# Altium PCB pcb-6layer-1oz-1.6mm.PcbDoc
Units mm, origin at the board's own origin, x right, y up, seen from the top; angles counter-clockwise.
Board outline 150 x 100 mm, 6 copper layers (Top Layer(SIG1), MID1(SIG2), MID2(GND), MID3(PWR), MID4(GND), Bottom Layer(SIG3)), stack 1.579 mm thick; 44 components, 79 nets, 674 pads, 0 vias.
Unrouted connection lines stored in the file: 256.
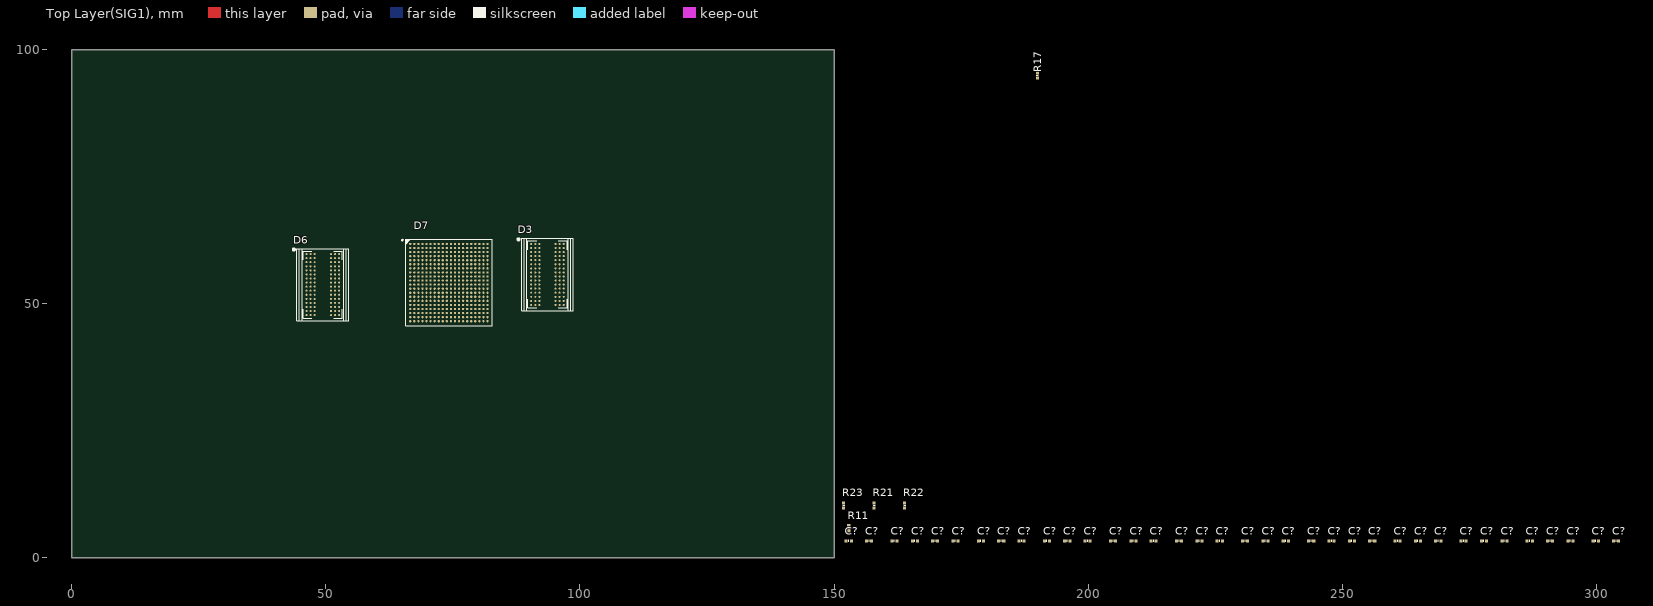
[diagram p0: Top Layer(SIG1) view]
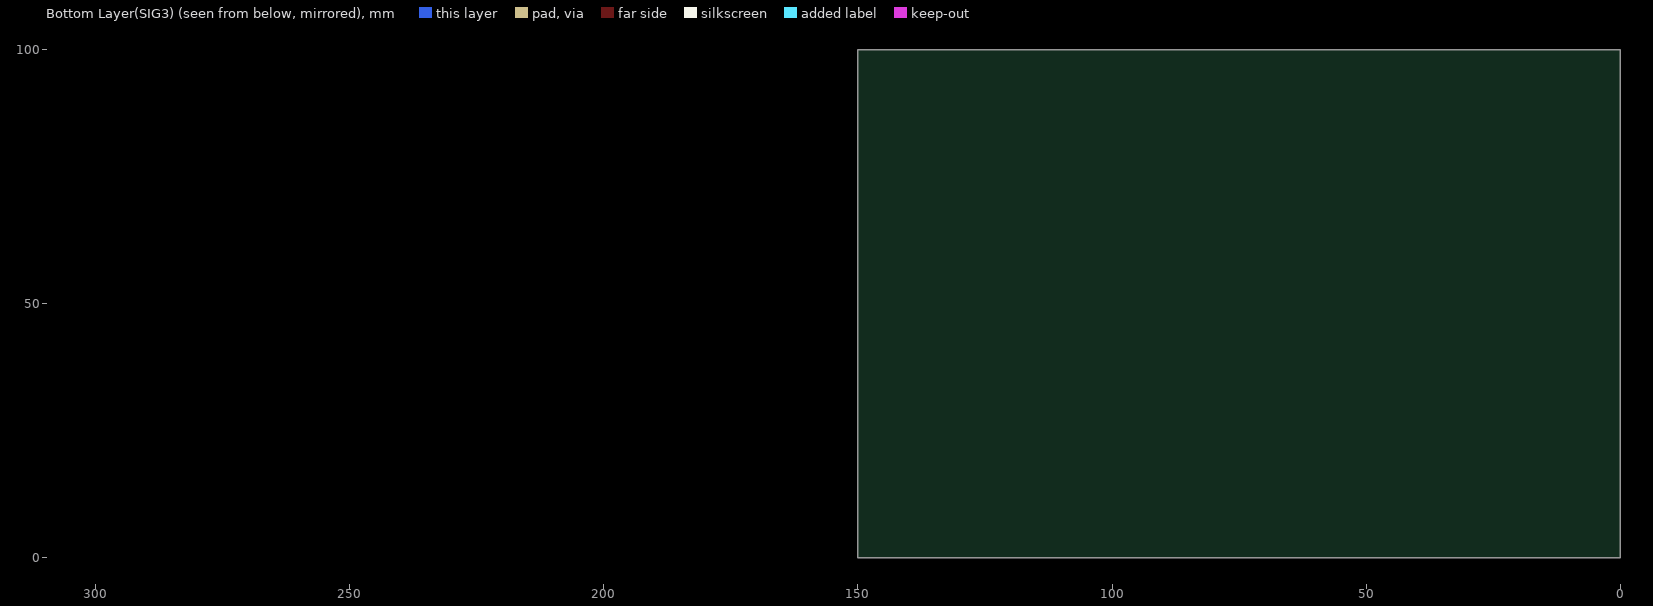
[diagram p1: Bottom Layer(SIG3) view, seen from below]

## Layer stack, top to bottom
Top Solder: solder mask 0.01, Solder Resist, Dk 3.5
Top Layer(SIG1): signal copper 0.036
Dielectric 2: prepreg 0.071, PP-006, Dk 4.1
MID1(SIG2): signal copper 0.036
Dielectric 4: prepreg 0.071, PP-006, Dk 4.1
MID2(GND): signal copper 0.036
Dielectric 1: dielectric 1.079, FR-4, Dk 4.8
MID3(PWR): signal copper 0.036
Dielectric 5: prepreg 0.071, PP-006, Dk 4.1
MID4(GND): signal copper 0.036
Dielectric 3: prepreg 0.071, PP-006, Dk 4.1
Bottom Layer(SIG3): signal copper 0.036
Bottom Solder: solder mask 0.01, Solder Resist, Dk 3.5

## Board outline
0,0 150,0 150,100 0,100

## Design rules (kind name [scope] priority, off if disabled: settings)
AssemblyTestPointUsage [All] p1 off:
AssemblyTestpoint [All] p1 off: testpointundercomponent=TRUE minsize=1.016 maxsize=2.54 preferedsize=1.524 minholesize=0 maxholesize=1.016 preferedholesize=0.813 testpointgrid=0.025 usegrid=TRUE gridtolerance=0 allowsidetop=TRUE allowsidebottom=TRUE
BoardOutlineClearance [All] p1: gap=0.3 ignorepadtopadclearanceinfootprint=FALSE
Clearance Clearance_MultiLayerPad [OnLayer('Multi-Layer') and IsPad] p1: gap=0.2 ignorepadtopadclearanceinfootprint=FALSE except(0: Arc-Hole Track-Hole SMDPad-Hole THPad-Hole Via-Hole Fill-Hole Poly-Hole Region-Hole Text-Hole)
Clearance Clearance_Polygon [InPolygon] p2: gap=0.254 ignorepadtopadclearanceinfootprint=TRUE except(0: Arc-Hole Track-Hole SMDPad-Hole THPad-Hole Via-Hole Fill-Hole Poly-Hole Region-Hole Text-Hole)
Clearance [All] p3: gap=0.2 ignorepadtopadclearanceinfootprint=FALSE except(0.15: Arc-SMDPad Track-SMDPad)
ComponentClearance [All] p1: gap=0.5 collisioncheckmode=3 verticalgap=0.5 showdistances=FALSE
DiffPairsRouting [All] p1: maxlimit=0.3 minlimit=0.1 mostfreqgap=0.15 toplayer_minwidth=0.1 toplayer_maxwidth=0.3 toplayer_prefwidth=0.15 midlayer1_minwidth=0.1 midlayer1_maxwidth=0.3 midlayer1_prefwidth=0.15 midlayer2_minwidth=0.1 midlayer2_maxwidth=0.3 midlayer2_prefwidth=0.15 midlayer3_minwidth=0.1 midlayer3_maxwidth=0.3 midlayer3_prefwidth=0.15 midlayer4_minwidth=0.1 midlayer4_maxwidth=0.3 midlayer4_prefwidth=0.15 bottomlayer_minwidth=0.1 bottomlayer_maxwidth=0.3 bottomlayer_prefwidth=0.15 maxuncoupledlength=12.7
FabricationTestPointUsage [All] p1 off: valid=0 allowmultiple=FALSE
FabricationTestpoint [All] p1 off: side=3 testpointundercomponent=TRUE minsize=1.016 maxsize=2.54 preferedsize=1.524 minholesize=0 maxholesize=1.016 preferedholesize=0.813 testpointgrid=0.025 allowsidetop=TRUE allowsidebottom=TRUE usegrid=TRUE gridtolerance=0
Height [All] p1: minheight=0 maxheight=50 prefheight=12.7
HoleSize [IsVia] p1: absolutevalues=TRUE maxlimit=10 minlimit=0.3 maxpercent=80.000 minpercent=20.000
HoleToHoleClearance [All] p1: gap=0.3 allowstackedmicrovias=TRUE
MatchedLengths MatchedLengths_SPI1 [InNetClass('SPI1')] p1: tolerance=0.25 checknetsindiffpair=FALSE checkdiffpairvsdiffpair=TRUE checkxsignals=TRUE checkothers=TRUE
MatchedLengths MatchedLengths_SPI_eeprom [InNetClass('SPI_eeprom')] p2: tolerance=0.25 checknetsindiffpair=FALSE checkdiffpairvsdiffpair=TRUE checkxsignals=TRUE checkothers=TRUE
MatchedLengths MatchedLengths_USART_gps [InNetClass('usart_GPS')] p3: tolerance=0.25 checknetsindiffpair=FALSE checkdiffpairvsdiffpair=TRUE checkxsignals=TRUE checkothers=TRUE
MatchedLengths MatchedLengths_SWD_F407 [InNetClass('STM32F4_swd')] p4: tolerance=0.25 checknetsindiffpair=FALSE checkdiffpairvsdiffpair=TRUE checkxsignals=TRUE checkothers=TRUE
MatchedLengths MatchedLengths_SPI_fram [InNetClass('SPI_fram')] p5: tolerance=0.25 checknetsindiffpair=FALSE checkdiffpairvsdiffpair=TRUE checkxsignals=TRUE checkothers=TRUE
MinimumSolderMaskSliver [All] p1 off: minsoldermaskwidth=0.2
PlaneClearance [All] p1: clearance=0.5
PlaneConnect [All] p1: planeconnectstyle=Relief reliefexpansion=0.5 reliefentries=4 reliefconductorwidth=0.2 reliefairgap=0.2
PolygonConnect PolygonConnect_PadGND [InNet('GND') and IsPad] p1: connectstyle=Relief reliefconductorwidth=0.2 reliefentries=4 polygonreliefangle="90 Angle" airgapwidth=0.2
PolygonConnect PolygonConnect_Via [IsVia] p2: connectstyle=Direct reliefconductorwidth=0.254 reliefentries=4 polygonreliefangle="90 Angle" airgapwidth=0.254
PolygonConnect [All] p3: connectstyle=Relief reliefconductorwidth=0.2 reliefentries=4 polygonreliefangle="90 Angle" airgapwidth=0.2
RoutingVias [All] p1: holewidth=0.2 width=0.45 viastyle="Through Hole" minholewidth=0.2 minwidth=0.4 maxholewidth=0.5 maxwidth=1.2
SilkToSilkClearance [All] p1 off: silktosilkclearance=0.254
SilkToSolderMaskClearance [IsPad] p1 off: minsilkscreentomaskgap=0.2 clearancetoexposedcopper=TRUE
SolderMaskExpansion [All] p1: expansion=0.075 istentingtop=FALSE
Width [All] p1: maxlimit=10 minlimit=0.1 preferedwidth=0.2
16 further rules are at their usual default settings.

## Classes and differential pairs
net class DQ24_31: DDR3_DM3 DDR3_DQ24 DDR3_DQ25 DDR3_DQ26 DDR3_DQ27 DDR3_DQ28 DDR3_DQ29 DDR3_DQ30 DDR3_DQ31
net class DQ16_23: DDR3_DM2 DDR3_DQ16 DDR3_DQ17 DDR3_DQ18 DDR3_DQ19 DDR3_DQ20 DDR3_DQ21 DDR3_DQ22 DDR3_DQ23
net class DQ8_15: DDR3_DM1 DDR3_DQ8 DDR3_DQ9 DDR3_DQ10 DDR3_DQ11 DDR3_DQ12 DDR3_DQ13 DDR3_DQ14 DDR3_DQ15 DDR3_DQS1_N DDR3_DQS1_P
net class DQ0_7: DDR3_DM0 DDR3_DQ0 DDR3_DQ1 DDR3_DQ2 DDR3_DQ3 DDR3_DQ4 DDR3_DQ5 DDR3_DQ6 DDR3_DQ7 DDR3_DQS0_N DDR3_DQS0_P
component class Designator: D7 R21 R22 R23
net class DDR_ADDRES: DDR3_A0 DDR3_A1 DDR3_A2 DDR3_A3 DDR3_A4 DDR3_A5 DDR3_A6 DDR3_A7 DDR3_A8 DDR3_A9 DDR3_A10 DDR3_A11 DDR3_A12 DDR3_A13 DDR3_A14 DDR3_BA0 DDR3_BA1 DDR3_BA2 DDR3_CK_N DDR3_CK_P DDR3_CKE DDR3_nCAS DDR3_nCS DDR3_nRAS DDR3_nWE DDR3_ODT
differential pair DDR3_DQS3: +DDR3_DQS3_P -DDR3_DQS3_N
differential pair DDR3_DQS2: +DDR3_DQS2_P -DDR3_DQS2_N
differential pair DDR3_DQS1: +DDR3_DQS1_P -DDR3_DQS1_N
differential pair DDR3_DQS0: +DDR3_DQS0_P -DDR3_DQS0_N
differential pair DDR3_CK: +DDR3_CK_P -DDR3_CK_N

## Components (designator, comment, footprint, x,y, rotation, side; value= is the part's Value field where it differs from the comment)
C? "Ceramic capacitor, 0.1μF, X7R, ±10%, 50V, 0402, -55...+125°C" "CAP: 0402" 230.887,3.359 r0 top value=0.1μF
C? "Ceramic capacitor, 0.1μF, X7R, ±10%, 50V, 0402, -55...+125°C" "CAP: 0402" 178.887,3.359 r0 top value=0.1μF
C? "Ceramic capacitor, 0.1μF, X7R, ±10%, 50V, 0402, -55...+125°C" "CAP: 0402" 204.887,3.359 r0 top value=0.1μF
C? "Ceramic capacitor, 0.1μF, X7R, ±10%, 50V, 0402, -55...+125°C" "CAP: 0402" 238.887,3.359 r0 top value=0.1μF
C? "Ceramic capacitor, 0.1μF, X7R, ±10%, 50V, 0402, -55...+125°C" "CAP: 0402" 247.887,3.359 r0 top value=0.1μF
C? "Ceramic capacitor, 0.1μF, X7R, ±10%, 50V, 0402, -55...+125°C" "CAP: 0402" 212.887,3.359 r0 top value=0.1μF
C? "Ceramic capacitor, 0.1μF, X7R, ±10%, 50V, 0402, -55...+125°C" "CAP: 0402" 221.887,3.359 r0 top value=0.1μF
C? "Ceramic capacitor, 0.1μF, X7R, ±10%, 50V, 0402, -55...+125°C" "CAP: 0402" 260.887,3.359 r0 top value=0.1μF
C? "Ceramic capacitor, 0.1μF, X7R, ±10%, 50V, 0402, -55...+125°C" "CAP: 0402" 191.887,3.359 r0 top value=0.1μF
C? "Ceramic capacitor, 0.1μF, X7R, ±10%, 50V, 0402, -55...+125°C" "CAP: 0402" 251.887,3.359 r0 top value=0.1μF
C? "Ceramic capacitor, 0.1μF, X7R, ±10%, 50V, 0402, -55...+125°C" "CAP: 0402" 294.887,3.359 r0 top value=0.1μF
C? "Ceramic capacitor, 0.1μF, X7R, ±10%, 50V, 0402, -55...+125°C" "CAP: 0402" 217.887,3.359 r0 top value=0.1μF
C? "Ceramic capacitor, 0.1μF, X7R, ±10%, 50V, 0402, -55...+125°C" "CAP: 0402" 186.887,3.359 r0 top value=0.1μF
C? "Ceramic capacitor, 0.1μF, X7R, ±10%, 50V, 0402, -55...+125°C" "CAP: 0402" 225.887,3.359 r0 top value=0.1μF
C? "Ceramic capacitor, 0.1μF, X7R, ±10%, 50V, 0402, -55...+125°C" "CAP: 0402" 299.887,3.359 r0 top value=0.1μF
C? "Ceramic capacitor, 0.1μF, X7R, ±10%, 50V, 0402, -55...+125°C" "CAP: 0402" 290.887,3.359 r0 top value=0.1μF
C? "Ceramic capacitor, 0.1μF, X7R, ±10%, 50V, 0402, -55...+125°C" "CAP: 0402" 169.887,3.359 r0 top value=0.1μF
C? "Ceramic capacitor, 0.1μF, X7R, ±10%, 50V, 0402, -55...+125°C" "CAP: 0402" 277.887,3.359 r0 top value=0.1μF
C? "Ceramic capacitor, 0.1μF, X7R, ±10%, 50V, 0402, -55...+125°C" "CAP: 0402" 234.887,3.359 r0 top value=0.1μF
C? "Ceramic capacitor, 0.1μF, X7R, ±10%, 50V, 0402, -55...+125°C" "CAP: 0402" 264.887,3.359 r0 top value=0.1μF
C? "Ceramic capacitor, 0.1μF, X7R, ±10%, 50V, 0402, -55...+125°C" "CAP: 0402" 152.887,3.359 r0 top value=0.1μF
C? "Ceramic capacitor, 0.1μF, X7R, ±10%, 50V, 0402, -55...+125°C" "CAP: 0402" 199.887,3.359 r0 top value=0.1μF
C? "Ceramic capacitor, 0.1μF, X7R, ±10%, 50V, 0402, -55...+125°C" "CAP: 0402" 182.887,3.359 r0 top value=0.1μF
C? "Ceramic capacitor, 0.1μF, X7R, ±10%, 50V, 0402, -55...+125°C" "CAP: 0402" 165.887,3.359 r0 top value=0.1μF
C? "Ceramic capacitor, 0.1μF, X7R, ±10%, 50V, 0402, -55...+125°C" "CAP: 0402" 303.887,3.359 r0 top value=0.1μF
C? "Ceramic capacitor, 0.1μF, X7R, ±10%, 50V, 0402, -55...+125°C" "CAP: 0402" 281.887,3.359 r0 top value=0.1μF
C? "Ceramic capacitor, 0.1μF, X7R, ±10%, 50V, 0402, -55...+125°C" "CAP: 0402" 286.887,3.359 r0 top value=0.1μF
C? "Ceramic capacitor, 0.1μF, X7R, ±10%, 50V, 0402, -55...+125°C" "CAP: 0402" 161.887,3.359 r0 top value=0.1μF
C? "Ceramic capacitor, 0.1μF, X7R, ±10%, 50V, 0402, -55...+125°C" "CAP: 0402" 173.887,3.359 r0 top value=0.1μF
C? "Ceramic capacitor, 0.1μF, X7R, ±10%, 50V, 0402, -55...+125°C" "CAP: 0402" 243.887,3.359 r0 top value=0.1μF
C? "Ceramic capacitor, 0.1μF, X7R, ±10%, 50V, 0402, -55...+125°C" "CAP: 0402" 195.887,3.359 r0 top value=0.1μF
C? "Ceramic capacitor, 0.1μF, X7R, ±10%, 50V, 0402, -55...+125°C" "CAP: 0402" 268.887,3.359 r0 top value=0.1μF
C? "Ceramic capacitor, 0.1μF, X7R, ±10%, 50V, 0402, -55...+125°C" "CAP: 0402" 273.887,3.359 r0 top value=0.1μF
C? "Ceramic capacitor, 0.1μF, X7R, ±10%, 50V, 0402, -55...+125°C" "CAP: 0402" 156.887,3.359 r0 top value=0.1μF
C? "Ceramic capacitor, 0.1μF, X7R, ±10%, 50V, 0402, -55...+125°C" "CAP: 0402" 208.887,3.359 r0 top value=0.1μF
C? "Ceramic capacitor, 0.1μF, X7R, ±10%, 50V, 0402, -55...+125°C" "CAP: 0402" 255.887,3.359 r0 top value=0.1μF
D3 "DDR3L SDRAM, DDR3, 128Mb (8M x 16), 166 MHz, Parallel, 3...3.6V, 0...+70°C, FBGA-96" "IC: FBGA96" 93.6,55.8 r0 top
D6 "DDR3L SDRAM, DDR3, 128Mb (8M x 16), 166 MHz, Parallel, 3...3.6V, 0...+70°C, FBGA-96" "IC: FBGA96" 49.4,53.8 r0 top
D7 "IC FPGA, Zynq, , , , 1.15...1.25V, 0...+85°C, CSPBGA-400" IC:BGA400C80P20X20_1700X1700X147 74.2,54.2 r0 top
R11 "Resistor film, 4.7k, ±1%, 0402, 0.063W, -55...+125°C" "RES: 0402" 152.887,5.859 r90 top value=4.7k
R17 "Resistor film, 240R, ±1%, 0603, 0.1W, -55...+125°C" "RES: 0402" 190,94.959 r90 top value=240R
R21 "Resistor film, 82R, ±1%, 0402, 0.063W, -55...+125°C" "RES: 0402" 157.887,10.359 r90 top value=82R
R22 "Resistor film, 82R, ±1%, 0402, 0.063W, -55...+125°C" "RES: 0402" 163.887,10.359 r90 top value=82R
R23 "Resistor film, 82R, ±1%, 0402, 0.063W, -55...+125°C" "RES: 0402" 151.887,10.359 r90 top value=82R

## Footprints (in the part's own frame and the unit in brackets; to place one, negate y for a bottom-side part, rotate by r counter-clockwise, add the part's x,y. Pads: shape width x height; smd on the part's side, far side on the other; paste and mask are expansions set on the pad)
"CAP: 0402" [mm]
  rect 0.6x0.6 smd: 1(-0.5,0) 2(0.5,0)
  silkscreen extent 0,-0.2 0,0.2, body extent -0.52,-0.25 0.51,0.25, height 0.51
"IC: FBGA96" [mm]
  round 0.4 smd: A1(-3.2,6) A2(-2.4,6) A3(-1.6,6) A7(1.6,6) A8(2.4,6) A9(3.2,6) B1(-3.2,5.2) B2(-2.4,5.2) B3(-1.6,5.2) B7(1.6,5.2) B8(2.4,5.2) B9(3.2,5.2) C1(-3.2,4.4) C2(-2.4,4.4) C3(-1.6,4.4) C7(1.6,4.4) C8(2.4,4.4) C9(3.2,4.4) D1(-3.2,3.6) D2(-2.4,3.6) D3(-1.6,3.6) D7(1.6,3.6) D8(2.4,3.6) D9(3.2,3.6) E1(-3.2,2.8) E2(-2.4,2.8) E3(-1.6,2.8) E7(1.6,2.8) E8(2.4,2.8) E9(3.2,2.8) F1(-3.2,2) F2(-2.4,2) F3(-1.6,2) F7(1.6,2) F8(2.4,2) F9(3.2,2) G1(-3.2,1.2) G2(-2.4,1.2) G3(-1.6,1.2) G7(1.6,1.2) G8(2.4,1.2) G9(3.2,1.2) H1(-3.2,0.4) H2(-2.4,0.4) H3(-1.6,0.4) H7(1.6,0.4) H8(2.4,0.4) H9(3.2,0.4) J1(-3.2,-0.4) J2(-2.4,-0.4) J3(-1.6,-0.4) J7(1.6,-0.4) J8(2.4,-0.4) J9(3.2,-0.4) K1(-3.2,-1.2) K2(-2.4,-1.2) K3(-1.6,-1.2) K7(1.6,-1.2) K8(2.4,-1.2) K9(3.2,-1.2) L1(-3.2,-2) L2(-2.4,-2) L3(-1.6,-2) L7(1.6,-2) L8(2.4,-2) L9(3.2,-2) M1(-3.2,-2.8) M2(-2.4,-2.8) M3(-1.6,-2.8) M7(1.6,-2.8) M8(2.4,-2.8) M9(3.2,-2.8) N1(-3.2,-3.6) N2(-2.4,-3.6) N3(-1.6,-3.6) N7(1.6,-3.6) N8(2.4,-3.6) N9(3.2,-3.6) P1(-3.2,-4.4) P2(-2.4,-4.4) P3(-1.6,-4.4) P7(1.6,-4.4) P8(2.4,-4.4) P9(3.2,-4.4) R1(-3.2,-5.2) R2(-2.4,-5.2) R3(-1.6,-5.2) R7(1.6,-5.2) R8(2.4,-5.2) R9(3.2,-5.2) T1(-3.2,-6) T2(-2.4,-6) T3(-1.6,-6) T7(1.6,-6) T8(2.4,-6) T9(3.2,-6)
  silkscreen extent -5.9,-7.1 5.1,7.1, body extent -4,-7 4,7, height 1.35
IC:BGA400C80P20X20_1700X1700X147 [mm] "BGA, 400-Leads, Body 17,00x17,00mmx1,47mm, Pitch 0,80mm"
  round 0.45 smd: A1(-7.6,7.6) A2(-6.8,7.6) A3(-6,7.6) A4(-5.2,7.6) A5(-4.4,7.6) A6(-3.6,7.6) A7(-2.8,7.6) A8(-2,7.6) A9(-1.2,7.6) A10(-0.4,7.6) A11(0.4,7.6) A12(1.2,7.6) A13(2,7.6) A14(2.8,7.6) A15(3.6,7.6) A16(4.4,7.6) A17(5.2,7.6) A18(6,7.6) A19(6.8,7.6) A20(7.6,7.6) B1(-7.6,6.8) B2(-6.8,6.8) B3(-6,6.8) B4(-5.2,6.8) B5(-4.4,6.8) B6(-3.6,6.8) B7(-2.8,6.8) B8(-2,6.8) B9(-1.2,6.8) B10(-0.4,6.8) B11(0.4,6.8) B12(1.2,6.8) B13(2,6.8) B14(2.8,6.8) B15(3.6,6.8) B16(4.4,6.8) B17(5.2,6.8) B18(6,6.8) B19(6.8,6.8) B20(7.6,6.8) C1(-7.6,6) C2(-6.8,6) C3(-6,6) C4(-5.2,6) C5(-4.4,6) C6(-3.6,6) C7(-2.8,6) C8(-2,6) C9(-1.2,6) C10(-0.4,6) C11(0.4,6) C12(1.2,6) C13(2,6) C14(2.8,6) C15(3.6,6) C16(4.4,6) C17(5.2,6) C18(6,6) C19(6.8,6) C20(7.6,6) D1(-7.6,5.2) D2(-6.8,5.2) D3(-6,5.2) D4(-5.2,5.2) D5(-4.4,5.2) D6(-3.6,5.2) D7(-2.8,5.2) D8(-2,5.2) D9(-1.2,5.2) D10(-0.4,5.2) D11(0.4,5.2) D12(1.2,5.2) D13(2,5.2) D14(2.8,5.2) D15(3.6,5.2) D16(4.4,5.2) D17(5.2,5.2) D18(6,5.2) D19(6.8,5.2) D20(7.6,5.2) E1(-7.6,4.4) E2(-6.8,4.4) E3(-6,4.4) E4(-5.2,4.4) E5(-4.4,4.4) E6(-3.6,4.4) E7(-2.8,4.4) E8(-2,4.4) E9(-1.2,4.4) E10(-0.4,4.4) E11(0.4,4.4) E12(1.2,4.4) E13(2,4.4) E14(2.8,4.4) E15(3.6,4.4) E16(4.4,4.4) E17(5.2,4.4) E18(6,4.4) E19(6.8,4.4) E20(7.6,4.4) F1(-7.6,3.6) F2(-6.8,3.6) F3(-6,3.6) F4(-5.2,3.6) F5(-4.4,3.6) F6(-3.6,3.6) F7(-2.8,3.6) F8(-2,3.6) F9(-1.2,3.6) F10(-0.4,3.6) F11(0.4,3.6) F12(1.2,3.6) F13(2,3.6) F14(2.8,3.6) F15(3.6,3.6) F16(4.4,3.6) F17(5.2,3.6) F18(6,3.6) F19(6.8,3.6) F20(7.6,3.6) G1(-7.6,2.8) G2(-6.8,2.8) G3(-6,2.8) G4(-5.2,2.8) G5(-4.4,2.8) G6(-3.6,2.8) G7(-2.8,2.8) G8(-2,2.8) G9(-1.2,2.8) G10(-0.4,2.8) G11(0.4,2.8) G12(1.2,2.8) G13(2,2.8) G14(2.8,2.8) G15(3.6,2.8) G16(4.4,2.8) G17(5.2,2.8) G18(6,2.8) G19(6.8,2.8) G20(7.6,2.8) H1(-7.6,2) H2(-6.8,2) H3(-6,2) H4(-5.2,2) H5(-4.4,2) H6(-3.6,2) H7(-2.8,2) H8(-2,2) H9(-1.2,2) H10(-0.4,2) H11(0.4,2) H12(1.2,2) H13(2,2) H14(2.8,2) H15(3.6,2) H16(4.4,2) H17(5.2,2) H18(6,2) H19(6.8,2) H20(7.6,2) J1(-7.6,1.2) J2(-6.8,1.2) J3(-6,1.2) J4(-5.2,1.2) J5(-4.4,1.2) J6(-3.6,1.2) J7(-2.8,1.2) J8(-2,1.2) J9(-1.2,1.2) J10(-0.4,1.2) J11(0.4,1.2) J12(1.2,1.2) J13(2,1.2) J14(2.8,1.2) J15(3.6,1.2) J16(4.4,1.2) J17(5.2,1.2) J18(6,1.2) J19(6.8,1.2) J20(7.6,1.2) K1(-7.6,0.4) K2(-6.8,0.4) K3(-6,0.4) K4(-5.2,0.4) K5(-4.4,0.4) K6(-3.6,0.4) K7(-2.8,0.4) K8(-2,0.4) K9(-1.2,0.4) K10(-0.4,0.4) K11(0.4,0.4) K12(1.2,0.4) K13(2,0.4) K14(2.8,0.4) K15(3.6,0.4) K16(4.4,0.4) K17(5.2,0.4) K18(6,0.4) K19(6.8,0.4) K20(7.6,0.4) L1(-7.6,-0.4) L2(-6.8,-0.4) L3(-6,-0.4) L4(-5.2,-0.4) L5(-4.4,-0.4) L6(-3.6,-0.4) L7(-2.8,-0.4) L8(-2,-0.4) L9(-1.2,-0.4) L10(-0.4,-0.4) L11(0.4,-0.4) L12(1.2,-0.4) L13(2,-0.4) L14(2.8,-0.4) L15(3.6,-0.4) L16(4.4,-0.4) L17(5.2,-0.4) L18(6,-0.4) L19(6.8,-0.4) L20(7.6,-0.4) M1(-7.6,-1.2) M2(-6.8,-1.2) M3(-6,-1.2) M4(-5.2,-1.2) M5(-4.4,-1.2) M6(-3.6,-1.2) M7(-2.8,-1.2) M8(-2,-1.2) M9(-1.2,-1.2) M10(-0.4,-1.2) M11(0.4,-1.2) M12(1.2,-1.2) M13(2,-1.2) M14(2.8,-1.2) M15(3.6,-1.2) M16(4.4,-1.2) M17(5.2,-1.2) M18(6,-1.2) M19(6.8,-1.2) M20(7.6,-1.2) N1(-7.6,-2) N2(-6.8,-2) N3(-6,-2) N4(-5.2,-2) N5(-4.4,-2) N6(-3.6,-2) N7(-2.8,-2) N8(-2,-2) N9(-1.2,-2) N10(-0.4,-2) N11(0.4,-2) N12(1.2,-2) N13(2,-2) N14(2.8,-2) N15(3.6,-2) N16(4.4,-2) N17(5.2,-2) N18(6,-2) N19(6.8,-2) N20(7.6,-2) P1(-7.6,-2.8) P2(-6.8,-2.8) P3(-6,-2.8) P4(-5.2,-2.8) P5(-4.4,-2.8) P6(-3.6,-2.8) P7(-2.8,-2.8) P8(-2,-2.8) P9(-1.2,-2.8) P10(-0.4,-2.8) P11(0.4,-2.8) P12(1.2,-2.8) P13(2,-2.8) P14(2.8,-2.8) P15(3.6,-2.8) P16(4.4,-2.8) P17(5.2,-2.8) P18(6,-2.8) P19(6.8,-2.8) P20(7.6,-2.8) R1(-7.6,-3.6) R2(-6.8,-3.6) R3(-6,-3.6) R4(-5.2,-3.6) R5(-4.4,-3.6) R6(-3.6,-3.6) R7(-2.8,-3.6) R8(-2,-3.6) R9(-1.2,-3.6) R10(-0.4,-3.6) R11(0.4,-3.6) R12(1.2,-3.6) R13(2,-3.6) R14(2.8,-3.6) R15(3.6,-3.6) R16(4.4,-3.6) R17(5.2,-3.6) R18(6,-3.6) R19(6.8,-3.6) R20(7.6,-3.6) T1(-7.6,-4.4) T2(-6.8,-4.4) T3(-6,-4.4) T4(-5.2,-4.4) T5(-4.4,-4.4) T6(-3.6,-4.4) T7(-2.8,-4.4) T8(-2,-4.4) T9(-1.2,-4.4) T10(-0.4,-4.4) T11(0.4,-4.4) T12(1.2,-4.4) T13(2,-4.4) T14(2.8,-4.4) T15(3.6,-4.4) T16(4.4,-4.4) T17(5.2,-4.4) T18(6,-4.4) T19(6.8,-4.4) T20(7.6,-4.4) U1(-7.6,-5.2) U2(-6.8,-5.2) U3(-6,-5.2) U4(-5.2,-5.2) U5(-4.4,-5.2) U6(-3.6,-5.2) U7(-2.8,-5.2) U8(-2,-5.2) U9(-1.2,-5.2) U10(-0.4,-5.2) U11(0.4,-5.2) U12(1.2,-5.2) U13(2,-5.2) U14(2.8,-5.2) U15(3.6,-5.2) U16(4.4,-5.2) U17(5.2,-5.2) U18(6,-5.2) U19(6.8,-5.2) U20(7.6,-5.2) V1(-7.6,-6) V2(-6.8,-6) V3(-6,-6) V4(-5.2,-6) V5(-4.4,-6) V6(-3.6,-6) V7(-2.8,-6) V8(-2,-6) V9(-1.2,-6) V10(-0.4,-6) V11(0.4,-6) V12(1.2,-6) V13(2,-6) V14(2.8,-6) V15(3.6,-6) V16(4.4,-6) V17(5.2,-6) V18(6,-6) V19(6.8,-6) V20(7.6,-6) W1(-7.6,-6.8) W2(-6.8,-6.8) W3(-6,-6.8) W4(-5.2,-6.8) W5(-4.4,-6.8) W6(-3.6,-6.8) W7(-2.8,-6.8) W8(-2,-6.8) W9(-1.2,-6.8) W10(-0.4,-6.8) W11(0.4,-6.8) W12(1.2,-6.8) W13(2,-6.8) W14(2.8,-6.8) W15(3.6,-6.8) W16(4.4,-6.8) W17(5.2,-6.8) W18(6,-6.8) W19(6.8,-6.8) W20(7.6,-6.8) Y1(-7.6,-7.6) Y2(-6.8,-7.6) Y3(-6,-7.6) Y4(-5.2,-7.6) Y5(-4.4,-7.6) Y6(-3.6,-7.6) Y7(-2.8,-7.6) Y8(-2,-7.6) Y9(-1.2,-7.6) Y10(-0.4,-7.6) Y11(0.4,-7.6) Y12(1.2,-7.6) Y13(2,-7.6) Y14(2.8,-7.6) Y15(3.6,-7.6) Y16(4.4,-7.6) Y17(5.2,-7.6) Y18(6,-7.6) Y19(6.8,-7.6) Y20(7.6,-7.6)
  silkscreen extent -9.27,-8.5 8.5,8.5, body extent -8.5,-8.5 8.5,8.5, height 1.47
"RES: 0402" [mm]
  rect 0.6x0.6 smd: 1(-0.5,0) 2(0.5,0)
  silkscreen extent 0,-0.2 0,0.2, body extent -0.52,-0.25 0.47,0.25, height 0.34

## Part data
C? C? C? C? C? C? C? C? C? C? C? C? C? C? C? C? C? C? C? C? C? C? C? C? C? C? C? C? C? C? C? C? C? C? C? C?: library part Ceramic_0402, Manufacturer="Murata Electronics", Package=0402, PartNumber=GRM155R71H104KE14D, Temperature=-55...+125°C, Tolerance=±10%, TypeCapacitor="Ceramic capacitor", TypeDielectric=X7R, Voltage=50V, HelpURL=https://www.lcsc.com/product-detail/Multilayer-Ceramic-Capacitors-MLCC-SMD-SMT_Murata-Electronics-GRM155R71H104KE14D_C77020.html, ValueManufacturerPartNumber="Ceramic capacitor, 0.1μF, X7R, ±10%, 50V, 0402, -55...+125°C"
D3 D6: library part MT41K256M16TW-107, "DDR3L SDRAM", Manufacturer="Micron Tech", Package=FBGA-96, Temperature=0...+70°C, ComponentType="DDR3L SDRAM", HelpURL=https://www.lcsc.com/product-detail/DDR-SDRAM_Micron-Tech-MT41K256M16TW-107-IT-P_C367428.html, InterfaceData=Parallel, MemorySize="128Mb (8M x 16)", MemoryType=DDR3, PartNumber=MT41K256M16TW-107, Speed="166 MHz", Supply=3...3.6V, ValueManufacturerPartNumber="DDR3L SDRAM, DDR3, 128Mb (8M x 16), 166 MHz, Parallel, 3...3.6V, 0...+70°C, FBGA-96"
D7: library part XC7Z020_CLG400ABX22, "FPGA XILINX Zynq XC7Z020", Manufacturer=AMD/XILINX, Package=CSPBGA-400, PartNumber=XC7Z020-2CLG400I, Temperature=0...+85°C, ComponentType="IC FPGA", HelpURL=https://www.lcsc.com/product-detail/Programmable-Logic-Device-CPLDs-FPGAs_AMD-XILINX-XC7Z020-2CLG400I_C569043.html, Series=Zynq, Supply=1.15...1.25V, ValueManufacturerPartNumber="IC FPGA, Zynq, , , , 1.15...1.25V, 0...+85°C, CSPBGA-400"
R11: library part Resistor_0402, Manufacturer=Yageo, Package=0402, PartNumber=RC0402FR-074K7L, Power=0.063W, Temperature=-55...+125°C, Tolerance=±1%, TypeResistor="Resistor film", HelpURL=https://www.lcsc.com/product-detail/Chip-Resistor-Surface-Mount_YAGEO-RC0402FR-074K7L_C105871.html, ValueManufacturerPartNumber="Resistor film, 4.7k, ±1%, 0402, 0.063W, -55...+125°C"
R17: library part Resistor_0603, Manufacturer=Yageo, Package=0603, PartNumber=RC0603JR-07100RL, Power=0.1W, Temperature=-55...+125°C, Tolerance=±1%, TypeResistor="Resistor film", HelpURL=https://www.digikey.com/product-detail/en/yageo/RC0603JR-07100RL/311-100GRCT-ND/729644, ValueManufacturerPartNumber="Resistor film, 240R, ±1%, 0603, 0.1W, -55...+125°C"
R21 R22 R23: library part Resistor_0402, Manufacturer=Yageo, Package=0402, PartNumber=RC0402FR-0782RL, Power=0.063W, Temperature=-55...+125°C, Tolerance=±1%, TypeResistor="Resistor film", HelpURL=https://www.lcsc.com/product-detail/Chip-Resistor-Surface-Mount_YAGEO-RC0402FR-0782RL_C163453.html, ValueManufacturerPartNumber="Resistor film, 82R, ±1%, 0402, 0.063W, -55...+125°C"

## Nets (pads, with @x,y where several pads share a name; then routed paths per layer and width w, separated by ;. In a path a pad name is that pad's centre, name@x,y a point inside that pad or via, vN(x,y) a via of type N, cw(c..) or ccw(c..) an arc to the next point about the centre after c; other vN are vias at no path point)
DDR3_A0: D3.N3 D6.N3 D7.N2
DDR3_A1: D3.P7 D6.P7 D7.K2
DDR3_A2: D3.P3 D6.P3 D7.M3
DDR3_A3: D3.N2 D6.N2 D7.K3
DDR3_A4: D3.P8 D6.P8 D7.M4
DDR3_A5: D3.P2 D6.P2 D7.L1
DDR3_A6: D3.R8 D6.R8 D7.L4
DDR3_A7: D3.R2 D6.R2 D7.K4
DDR3_A8: D3.T8 D6.T8 D7.K1
DDR3_A9: D3.R3 D6.R3 D7.J4
DDR3_A10: D3.L7 D6.L7 D7.F5
DDR3_A11: D3.R7 D6.R7 D7.G4
DDR3_A12: D3.N7 D6.N7 D7.E4
DDR3_A13: D3.T3 D6.T3 D7.D4
DDR3_A14: D3.T7 D6.T7 D7.F4
DDR3_BA0: D3.M2 D6.M2 D7.L5
DDR3_BA1: D3.N8 D6.N8 D7.R4
DDR3_BA2: D3.M3 D6.M3 D7.J5
DDR3_CK_N: D3.K7 D6.K7 D7.M2 R22.1
DDR3_CK_P: D3.J7 D6.J7 D7.L2 R22.2
DDR3_CKE: D3.K9 D6.K9 D7.N3
DDR3_DM0: D6.E7 D7.A1
DDR3_DM1: D6.D3 D7.F1
DDR3_DM2: D3.E7 D7.T1
DDR3_DM3: D3.D3 D7.Y1
DDR3_DQ0: D6.E3 D7.C3
DDR3_DQ1: D6.F7 D7.B3
DDR3_DQ2: D6.F2 D7.A2
DDR3_DQ3: D6.F8 D7.A4
DDR3_DQ4: D6.H3 D7.D3
DDR3_DQ5: D6.H8 D7.D1
DDR3_DQ6: D6.G2 D7.C1
DDR3_DQ7: D6.H7 D7.E1
DDR3_DQ8: D6.D7 D7.E2
DDR3_DQ9: D6.C3 D7.E3
DDR3_DQ10: D6.C8 D7.G3
DDR3_DQ11: D6.C2 D7.H3
DDR3_DQ12: D6.A7 D7.J3
DDR3_DQ13: D6.A2 D7.H2
DDR3_DQ14: D6.B8 D7.H1
DDR3_DQ15: D6.A3 D7.J1
DDR3_DQ16: D3.E3 D7.P1
DDR3_DQ17: D3.F7 D7.P3
DDR3_DQ18: D3.F2 D7.R3
DDR3_DQ19: D3.F8 D7.R1
DDR3_DQ20: D3.H3 D7.T4
DDR3_DQ21: D3.H8 D7.U4
DDR3_DQ22: D3.G2 D7.U2
DDR3_DQ23: D3.H7 D7.U3
DDR3_DQ24: D3.D7 D7.V1
DDR3_DQ25: D3.C3 D7.Y3
DDR3_DQ26: D3.C8 D7.W1
DDR3_DQ27: D3.C2 D7.Y4
DDR3_DQ28: D3.A7 D7.Y2
DDR3_DQ29: D3.A2 D7.W3
DDR3_DQ30: D3.B8 D7.V2
DDR3_DQ31: D3.A3 D7.V3
DDR3_DQS0_N: D6.G3 D7.B2
DDR3_DQS0_P: D6.F3 D7.C2
DDR3_DQS1_N: D6.B7 D7.F2
DDR3_DQS1_P: D6.C7 D7.G2
DDR3_DQS2_N: D3.G3 D7.T2
DDR3_DQS2_P: D3.F3 D7.R2
DDR3_DQS3_N: D3.B7 D7.W4
DDR3_DQS3_P: D3.C7 D7.W5
DDR3_nCAS: D3.K3 D6.K3 D7.P5
DDR3_nCS: D3.L2 D6.L2 D7.N1
DDR3_nRAS: D3.J3 D6.J3 D7.P4
DDR3_nRESET: D7.B4
DDR3_nWE: D3.L3 D6.L3 D7.M5
DDR3_ODT: D3.K1 D6.K1 D7.N5
DDR3_VDD: C?.2 D3.A1 D3.A8 D3.B2 D3.C1 D3.C9 D3.D2 D3.D9 D3.E9 D3.F1 D3.G7 D3.H2 D3.H9 D3.K2 D3.K8 D3.N1 D3.N9 D3.R1 D3.R9 D6.A1 D6.A8 D6.B2 D6.C1 D6.C9 D6.D2 D6.D9 D6.E9 D6.F1 D6.G7 D6.H2 D6.H9 D6.K2 D6.K8 D6.N1 D6.N9 D6.R1 D6.R9 R21.1
DDR3_VREF: D3.H1 D3.M8 D6.H1 D6.M8
DDR3_VTT: 
GND: C?.1 D3.A9 D3.B1 D3.B3 D3.B9 D3.D1 D3.D8 D3.E1 D3.E2 D3.E8 D3.F9 D3.G1 D3.G8 D3.G9 D3.J2 D3.J8 D3.M1 D3.M9 D3.P1 D3.P9 D3.T1 D3.T9 D6.A9 D6.B1 D6.B3 D6.B9 D6.D1 D6.D8 D6.E1 D6.E2 D6.E8 D6.F9 D6.G1 D6.G8 D6.G9 D6.J2 D6.J8 D6.M1 D6.M9 D6.P1 D6.P9 D6.T1 D6.T9 R11.2 R17.2 R23.2
NetD3_L8: D3.L8
NetD6_L8: D6.L8 R17.1
NetD7_G5: D7.G5 R23.1
NetD7_H5: D7.H5 R21.2
pads on no net: D3.J1 D3.J9 D3.L1 D3.L9 D3.M7 D3.T2 D6.J1 D6.J9 D6.L1 D6.L9 D6.M7 D6.T2 D7.A3 D7.A5 D7.A6 D7.A7 D7.A8 D7.A9 D7.A10 D7.A11 D7.A12 D7.A13 D7.A14 D7.A15 D7.A16 D7.A17 D7.A18 D7.A19 D7.A20 D7.B1 D7.B5 D7.B6 D7.B7 D7.B8 D7.B9 D7.B10 D7.B11 D7.B12 D7.B13 D7.B14 D7.B15 D7.B16 D7.B17 D7.B18 D7.B19 D7.B20 D7.C4 D7.C5 D7.C6 D7.C7 D7.C8 D7.C9 D7.C10 D7.C11 D7.C12 D7.C13 D7.C14 D7.C15 D7.C16 D7.C17 D7.C18 D7.C19 D7.C20 D7.D2 D7.D5 D7.D6 D7.D7 D7.D8 D7.D9 D7.D10 D7.D11 D7.D12 D7.D13 D7.D14 D7.D15 D7.D16 D7.D17 D7.D18 D7.D19 D7.D20 D7.E5 D7.E6 D7.E7 D7.E8 D7.E9 D7.E10 D7.E11 D7.E12 D7.E13 D7.E14 D7.E15 D7.E16 D7.E17 D7.E18 D7.E19 D7.E20 D7.F3 D7.F6 D7.F7 D7.F8 D7.F9 D7.F10 D7.F11 D7.F12 D7.F13 D7.F14 D7.F15 D7.F16 D7.F17 D7.F18 D7.F19 D7.F20 D7.G1 D7.G6 D7.G7 D7.G8 D7.G9 D7.G10 D7.G11 D7.G12 D7.G13 D7.G14 D7.G15 D7.G16 D7.G17 D7.G18 D7.G19 D7.G20 D7.H4 D7.H6 D7.H7 D7.H8 D7.H9 D7.H10 D7.H11 D7.H12 D7.H13 D7.H14 D7.H15 D7.H16 D7.H17 D7.H18 D7.H19 D7.H20 D7.J2 D7.J6 D7.J7 D7.J8 D7.J9 D7.J10 D7.J11 D7.J12 D7.J13 D7.J14 D7.J15 D7.J16 D7.J17 D7.J18 D7.J19 D7.J20 D7.K5 D7.K6 D7.K7 D7.K8 D7.K9 D7.K10 D7.K11 D7.K12 D7.K13 D7.K14 D7.K15 D7.K16 D7.K17 D7.K18 D7.K19 D7.K20 D7.L3 D7.L6 D7.L7 D7.L8 D7.L9 D7.L10 D7.L11 D7.L12 D7.L13 D7.L14 D7.L15 D7.L16 D7.L17 D7.L18 D7.L19 D7.L20 D7.M1 D7.M6 D7.M7 D7.M8 D7.M9 D7.M10 D7.M11 D7.M12 D7.M13 D7.M14 D7.M15 D7.M16 D7.M17 D7.M18 D7.M19 D7.M20 D7.N4 D7.N6 D7.N7 D7.N8 D7.N9 D7.N10 D7.N11 D7.N12 D7.N13 D7.N14 D7.N15 D7.N16 D7.N17 D7.N18 D7.N19 D7.N20 D7.P2 D7.P6 D7.P7 D7.P8 D7.P9 D7.P10 D7.P11 D7.P12 D7.P13 D7.P14 D7.P15 D7.P16 D7.P17 D7.P18 D7.P19 D7.P20 D7.R5 D7.R6 D7.R7 D7.R8 D7.R9 D7.R10 D7.R11 D7.R12 D7.R13 D7.R14 D7.R15 D7.R16 D7.R17 D7.R18 D7.R19 D7.R20 D7.T3 D7.T5 D7.T6 D7.T7 D7.T8 D7.T9 D7.T10 D7.T11 D7.T12 D7.T13 D7.T14 D7.T15 D7.T16 D7.T17 D7.T18 D7.T19 D7.T20 D7.U1 D7.U5 D7.U6 D7.U7 D7.U8 D7.U9 D7.U10 D7.U11 D7.U12 D7.U13 D7.U14 D7.U15 D7.U16 D7.U17 D7.U18 D7.U19 D7.U20 D7.V4 D7.V5 D7.V6 D7.V7 D7.V8 D7.V9 D7.V10 D7.V11 D7.V12 D7.V13 D7.V14 D7.V15 D7.V16 D7.V17 D7.V18 D7.V19 D7.V20 D7.W2 D7.W6 D7.W7 D7.W8 D7.W9 D7.W10 D7.W11 D7.W12 D7.W13 D7.W14 D7.W15 D7.W16 D7.W17 D7.W18 D7.W19 D7.W20 D7.Y5 D7.Y6 D7.Y7 D7.Y8 D7.Y9 D7.Y10 D7.Y11 D7.Y12 D7.Y13 D7.Y14 D7.Y15 D7.Y16 D7.Y17 D7.Y18 D7.Y19 D7.Y20 R11.1

## Silkscreen, mask and mechanical layers (free items; w line width, h text height)
Board:
  the board outline again, w0.1